# EAGLE board object detector (EAGLE 9.7.0)

Size 334.93 x 170.54 mm. Coordinates in mm from the lower left corner, seen from the top.
Outline: 0,0 334.93,0 334.93,170.54 0,170.54 0,0
Copper layers (1*16): Top 0.035mm / dielectric 1.5mm / Bottom 0.035mm
Design rules "default": minimum track width 6mil, minimum drill 0.35mm, track to track 6mil, track to pad 6mil, pad to pad 6mil, via to via 6mil, smd to smd 6mil, copper to edge 40mil, drill to drill 6mil, minimum pad ring 10mil, minimum via ring 8mil, stop-mask expansion 4mil, vias tented up to drill 0mil, thermal gap 10mil

## Footprints (pad centres in the part's own frame; a part is rotated, then mirrored left to right if it is on the bottom)
HC-SR04 = drill 1.016 long: 1 -3.81,0; 2 -1.27,0; 3 1.27,0; 4 3.81,0
ARDUINO-UNO-R3-SHIELD = drill 1.016 pad 1.88: 3.3V 24.13,-2.54; 5V 24.13,0; A0 24.13,12.7; A1 24.13,15.24; A2 24.13,17.78; A3 24.13,20.32; A4 24.13,22.86; A5 24.13,25.4; AREF -24.13,-13.97; D2 -24.13,20.32; D3 -24.13,17.78; D4 -24.13,15.24; D5 -24.13,12.7; D6 -24.13,10.16; D7 -24.13,7.62; D8 -24.13,3.81; D9 -24.13,1.27; D10 -24.13,-1.27; D11 -24.13,-3.81; D12 -24.13,-6.35; D13 -24.13,-8.89; GND@0 24.13,2.54; GND@1 24.13,5.08; GND@2 -24.13,-11.43; IOREF 24.13,-7.62; NC 24.13,-10.16; RES 24.13,-5.08; RX -24.13,25.4; SCL -24.13,-19.05; SDA -24.13,-16.51; TX -24.13,22.86; VIN 24.13,7.62
TSOP48 = drill 0.8: 1 -2.54,0; 2 0,0; 3 2.54,0

## Placement (x,y rotation side)
DIST1  DISTANCE-SENSOR-4PINHC-SR04  [HC-SR04]  244.03,151.15 0 top
DIST2  DISTANCE-SENSOR-4PINHC-SR04  [HC-SR04]  259.82,22.23 0 top
DIST3  DISTANCE-SENSOR-4PINHC-SR04  [HC-SR04]  256.03,104.13 0 top
DIST4  DISTANCE-SENSOR-4PINHC-SR04  [HC-SR04]  261.83,61.05 0 top
U1  ARDUINO-UNO-R3-SHIELD  [ARDUINO-UNO-R3-SHIELD]  47.88,140.69 270 top
U3  IR-RECEIVERTSOP48  [TSOP48]  328.56,94.75 0 top

## Library data of the parts
DIST1-DIST4 U1 U3 = Tinkercad

## Nets
U1_5V: DIST1.1 DIST2.1 DIST3.1 DIST4.1 U1.5V U3.3
U1_D2: DIST4.2 U1.D2
U1_D3: DIST4.3 U1.D3
U1_D4: DIST3.2 U1.D4
U1_D5: DIST3.3 U1.D5
U1_D6: DIST1.2 U1.D6
U1_D7: DIST1.3 U1.D7
U1_D8: DIST2.2 U1.D8
U1_D9: DIST2.3 U1.D9
U1_D10: U1.D10 U3.1
U1_GND: DIST1.4 DIST2.4 DIST3.4 DIST4.4 U1.GND@0 U1.GND@1 U1.GND@2 U3.2

## Tracks (layer width: path | path; a pad name or v marks a point on that pad's centre or on a via)
U1_5V  (5 unrouted)
U1_D2  (1 unrouted)
U1_D3  (1 unrouted)
U1_D4  (1 unrouted)
U1_D5  (1 unrouted)
U1_D6  (1 unrouted)
U1_D7  (1 unrouted)
U1_D8  (1 unrouted)
U1_D9  (1 unrouted)
U1_D10  (1 unrouted)
U1_GND  (7 unrouted)